# Altium PCB nails_PCB_v2_diamond_4x4_ground_plane.PcbDoc
Units mil, origin at the board's own origin, x right, y up, seen from the top; angles counter-clockwise.
Board outline 639.76 x 1679.26 mil, 4 copper layers (Top Layer, Mid-Layer 1, Internal Plane 1, Bottom Layer); 42 components, 49 nets, 187 pads, 136 vias.
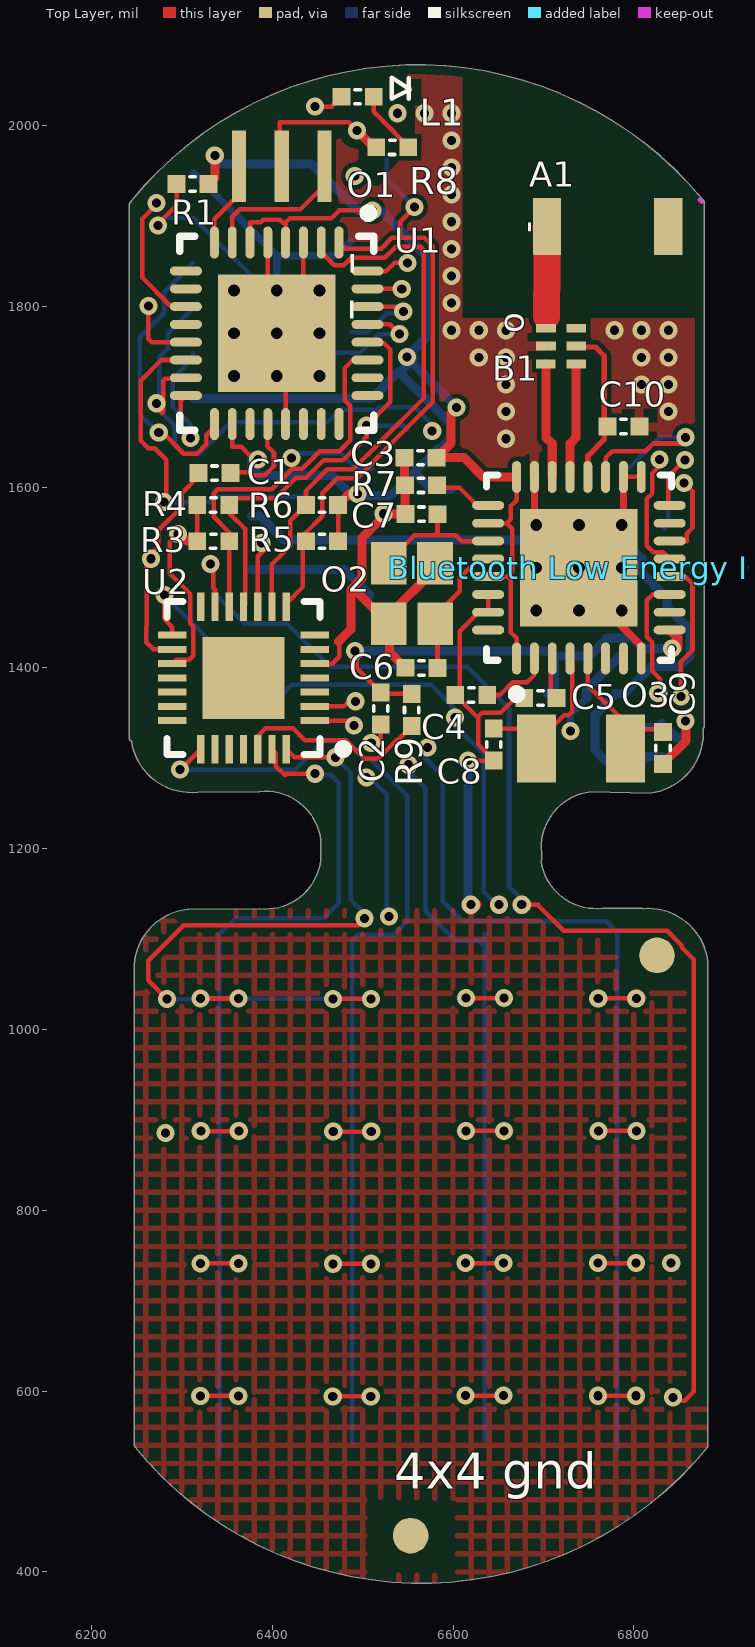
[diagram p0: Top Layer view]
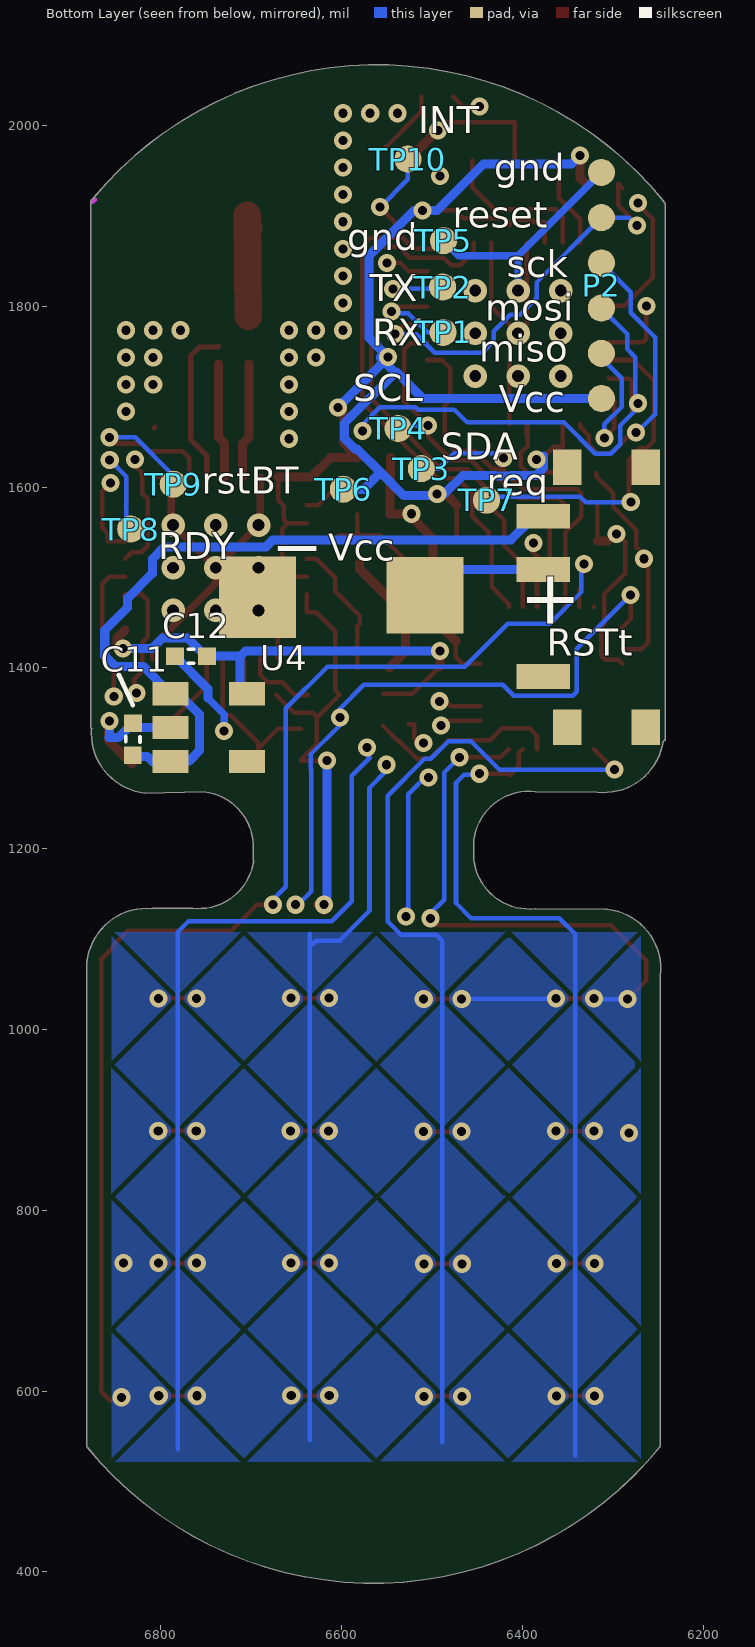
[diagram p1: Bottom Layer view, seen from below]
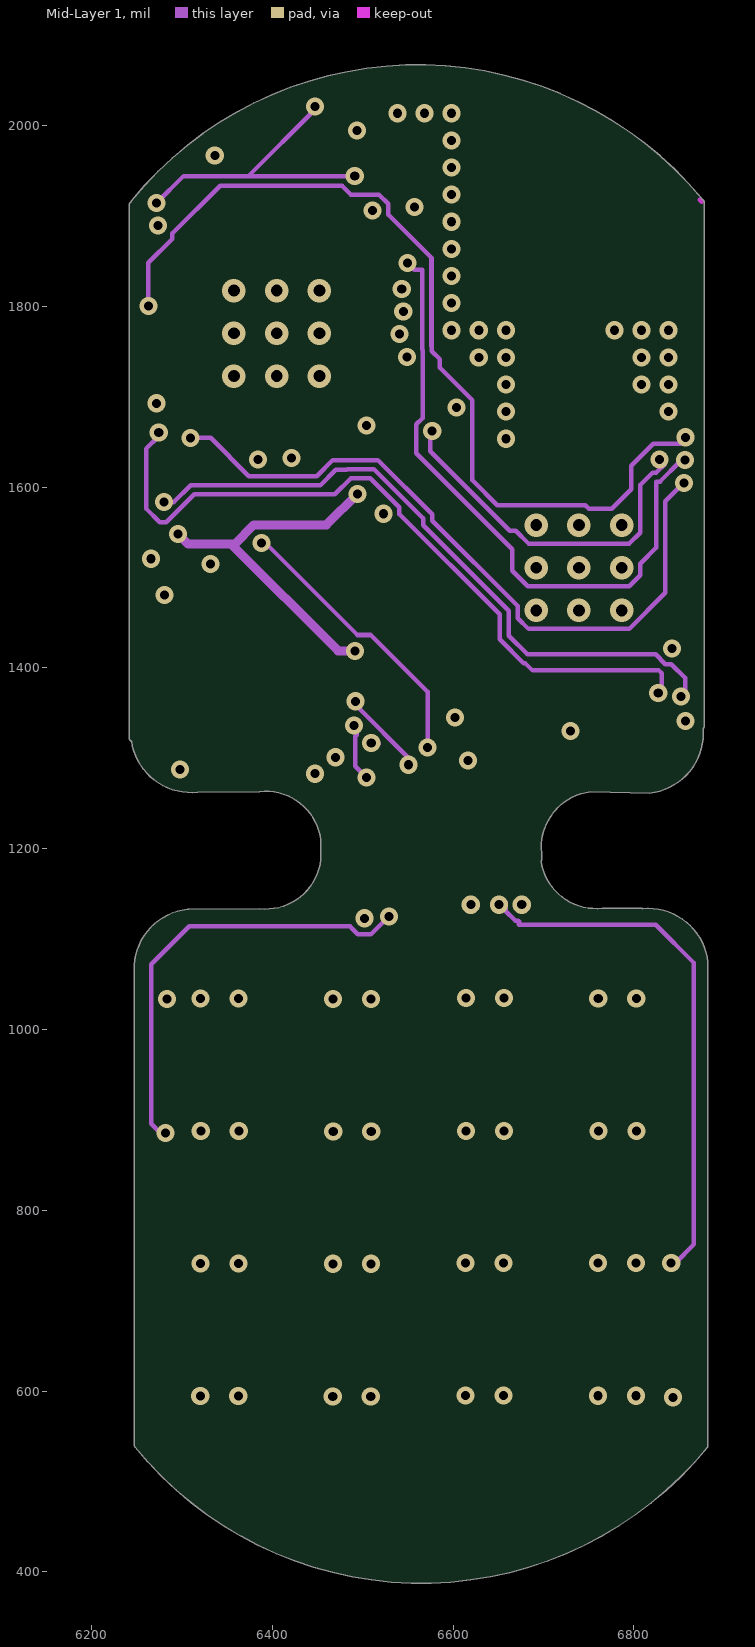
[diagram p2: Mid-Layer 1]
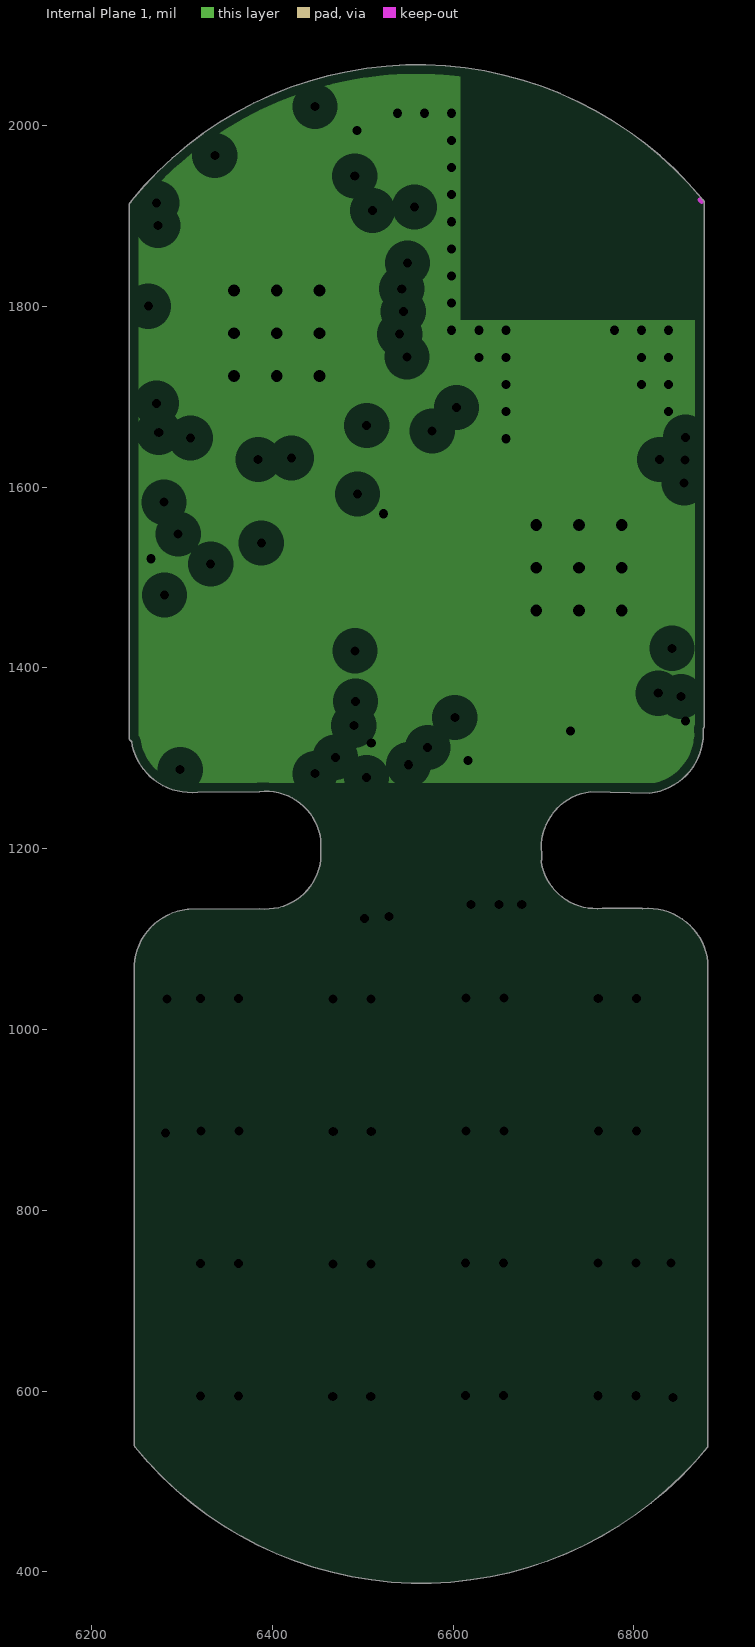
[diagram p3: Internal Plane 1, clearances drawn from the general rule]

## Layer stack, top to bottom
Top Layer: signal copper 1.4
Dielectric: core 12.6, FR-4, Dk 4.8
Mid-Layer 1: signal copper 1.4
Dielectric: prepreg 12.6, FR-4, Dk 4.8
Internal Plane 1: plane copper 1.4, net GND
Dielectric: core 12.6, FR-4, Dk 4.8
Bottom Layer: signal copper 1.4

## Board outline
6247.64,539.95 6247.64,1059.31 cw(c6250.1,1059.83) 6247.6,1059.56 cw(c6313.71,1066.9) 6306.34,1133.01 cw(c6306.62,1130.51) 6307.28,1132.93 6385.59,1133.57 cw(c6385.62,1131.05) 6385.61,1133.57 6385.6,1133.57 cw(c6385.62,1131.05) 6385.9,1133.55 ccw(c6392.69,1194.66) 6453.78,1187.73 6453.79,1209.06 cw(c6456.3,1209.06) 6453.81,1209.39 ccw(c6392.77,1201.97) 6385.98,1263.08 cw(c6385.71,1265.58) 6385.73,1263.06 6317.46,1262.43 cw(c6310.24,1328.55) 6244.42,1318.96 cw(c6244.65,1321.46) 6242.13,1321.46 6242.13,1912.65 cw(c6244.65,1912.65) 6243.77,1915 cw(c6246.28,1915.06) 6244.33,1916.65 cw(c6560.69,1658.99) 6874.82,1919.37 cw(c6872.88,1917.77) 6875.39,1918.02 cw(c6875.13,1915.52) 6877.65,1915.52 6877.65,1334.66 cw(c6875.13,1334.66) 6876.64,1332.65 cw(c6810.31,1327.6) 6876.83,1327.6 cw(c6810.31,1327.6) 6817.68,1261.49 cw(c6817.4,1263.99) 6817.35,1261.48 6752.18,1262.82 ccw(c6759.15,1201.73) 6698.05,1194.94 cw(c6695.55,1194.67) 6698.06,1194.67 cw(c6695.55,1194.67) 6698.06,1194.67 6698.06,1188.13 cw(c6695.55,1188.13) 6698.06,1188.13 cw(c6695.55,1188.13) 6697.39,1186.42 ccw(c6758.24,1195.2) 6765.03,1134.09 cw(c6765.31,1131.59) 6765.32,1134.1 6808.73,1133.92 cw(c6808.71,1131.41) 6809.92,1133.61 cw(c6815.78,1067.36) 6881.88,1074.72 cw(c6879.38,1074.44) 6881.9,1074.44 6881.9,539.45 cw(c6879.38,539.45) 6881.33,537.86 cw(c6564.97,795.52) 6248.2,538.36 cw(c6250.15,539.95)

## Design rules (kind name [scope] priority, off if disabled: settings)
Clearance [All] p1: gap=5
HoleSize [All] p1: absolutevalues=TRUE maxlimit=100 minlimit=10 maxpercent=80.000 minpercent=20.000
PlaneClearance [All] p1: clearance=20
PlaneConnect [All] p1: planeconnectstyle=Direct reliefexpansion=20 reliefentries=4 reliefconductorwidth=10 reliefairgap=10
PolygonConnect [All] p1: connectstyle=Direct reliefconductorwidth=10 reliefentries=4 polygonreliefangle="90 Angle" airgapwidth=10
RoutingVias [All] p1: holewidth=10 width=20 viastyle="Through Hole" minholewidth=10 minwidth=20 maxholewidth=20 maxwidth=50
SolderMaskExpansion [All] p1: expansion=4
Width [All] p1: maxlimit=30 minlimit=5 preferedwidth=5
25 further rules are at their usual default settings.

## Components (designator, comment, footprint, x,y, rotation, side; value= is the part's Value field where it differs from the comment)
* "ON_OFF_SWITCH" SWTICH_SMD_SIDE 6247.19,1398.4 r90 bottom
A1 "2.45 GHz Chip antenna" 2450AT18A100E 6714.43,1883.53 r0 top
B1 "2.45 GHz Bulan" 2450BM14A0002 6703.9,1740.12 r90 top
"Bluetooth Low Energy IC" "nRF8001" QFN32_W_GND 6740,1510 r90 top
C1 "0.1uF" 0402W 6321.07,1615.39 r0 top
C2 "0.1uF" 0402W 6520,1340 r90 top
C3 "4.7uF" 0402W 6548.9,1632.47 r0 top
C4 "0.1uF" 0402W 6605,1370 r0 top
C5 "0.033uF" 0402W 6681.47,1366.64 r0 top
C6 "6pF" 0402W 6550,1400 r0 top
C7 "6pF" 0402W 6550,1570 r0 top
C8 "18pF" 0402W 6645,1300 r90 top
C9 "18pF" 0402W 6832.13,1296.32 r90 top
C10 "22pF 5%" 0402W 6803.63,1666.74 r180 top
C11 "10uF" 0402W 6831.01,1336.17 r270 bottom
C12 "10uF" 0402W 6781.87,1412.92 r180 bottom
L1 "LED" 0402W 6479.39,2031.65 r0 top
O1 "Resonator SMD" "Resonator SMD" 6441.03,1952.83 r270 top
O2 "16 MHz Crystal Cl=8pF" "2.5 x 2.0 crystal" 6530,1450 r90 top
O3 "32.768 Crystal Cl=12.5pF" "32.768 Crystal" 6695,1310 r0 top
P2 "6 pin smd 1.27mm female" "6pos 1.27mm" 6625.68,1953.07 r90 bottom
R1 "10K" 0402W 6296.86,1935.23 r0 top
R3 "1.8K" 0402W 6350,1540 r180 top
R4 "1.8K" 0402W 6350,1580 r180 top
R5 "4.7K" 0402W 6440,1540 r0 top
R6 "4.7K" 0402W 6440,1580 r0 top
R7 "22k 1%" 0402W 6549.44,1601.91 r0 top
R8 "330" 0402W 6517.64,1975.75 r0 top
R9 "20K" 0402W 6554.33,1368.5 r270 top
TP1 "Test point small" "TEST POINT SMD SUPER SMALL" 6487.87,1770.99 r270 bottom
TP2 "Test point small" "TEST POINT SMD SUPER SMALL" 6488.39,1821.17 r270 bottom
TP3 "Test point small" "TEST POINT SMD SUPER SMALL" 6511.98,1620.29 r270 bottom
TP4 "Test point small" "TEST POINT SMD SUPER SMALL" 6537.67,1664.68 r270 bottom
TP5 "Test point small" "TEST POINT SMD SUPER SMALL" 6487.51,1872.41 r270 bottom
TP6 "Test point small" "TEST POINT SMD SUPER SMALL" 6598.25,1597.47 r270 bottom
TP7 "Test point small" "TEST POINT SMD SUPER SMALL" 6439.87,1585.32 r270 bottom
TP8 "Test point small" "TEST POINT SMD SUPER SMALL" 6833.38,1553.49 r270 bottom
TP9 "Test point small" "TEST POINT SMD SUPER SMALL" 6786.3,1603.08 r270 bottom
TP10 "Test point small" "TEST POINT SMD SUPER SMALL" 6526.85,1962.66 r270 bottom
U1 "ATmega328P-MUR" 32M1-A_M 6405,1770 r270 top
U2 "MTCH6102" QFN28_no_gnd_conn 6375,1395 r180 top
U4 "MIC5205_VOLTAGE_REG" SOT-23-5 6725.45,1355.65 r270 bottom

## Footprints (in the part's own frame and the unit in brackets; to place one, negate y for a bottom-side part, rotate by r counter-clockwise, add the part's x,y. Pads: shape width x height; smd on the part's side, far side on the other; paste and mask are expansions set on the pad)
"2.5 x 2.0 crystal" [mm]
  rect 1.2x1 smd: 1(-0.033,-1.273) 2(1.667,-1.273) 3(1.667,0.026) 4(-0.033,0.025)
  body extent -0.46,-1.62 2.05,0.38, height 0.5
"6pos 1.27mm" [mil]
  round 30 smd: 1(-255.18,-312.9) 2(-205.22,-312.81) 3(-155.19,-312.82) 4(-105.18,-312.84) 5(-55.15,-312.85) 6(-5.14,-312.83)
"32.768 Crystal" [mm] "for BLE radio"
  rect 1.1x1.9 smd: 1(-0.07,0.019) 2(2.432,0.02)
  body extent -0.39,-0.71 2.81,0.78, height 0.9
32M1-A_M [mm] "QFN, 32-Leads, Body 5x5mm, Pitch 0.5mm, IPC Low Density"
  oval 0.9x0.25 smd: 1(-2.55,1.75) 2(-2.55,1.25) 3(-2.55,0.75) 4(-2.55,0.25) 5(-2.55,-0.25) 6(-2.55,-0.75) 7(-2.55,-1.25) 8(-2.55,-1.75) 17(2.55,-1.75) 18(2.55,-1.25) 19(2.55,-0.75) 20(2.55,-0.25) 21(2.55,0.25) 22(2.55,0.75) 23(2.55,1.25) 24(2.55,1.75)
  oval 0.25x0.9 smd: 9(-1.75,-2.55) 10(-1.25,-2.55) 11(-0.75,-2.55) 12(-0.25,-2.55) 13(0.25,-2.55) 14(0.75,-2.55) 15(1.25,-2.55) 16(1.75,-2.55) 25(1.75,2.55) 26(1.25,2.55) 27(0.75,2.55) 28(0.25,2.55) 29(-0.25,2.55) 30(-0.75,2.55) 31(-1.25,2.55) 32(-1.75,2.55)
  rect 3.3x3.3 smd: 33(0,0)
  silkscreen extent -3.5,-2.73 2.73,2.73, body extent -2.58,-2.58 2.58,2.58, height 1
0402W [mm]
  rect 0.5x0.5 smd: 1(-0.066,0) 2(0.834,-0.001)
  silkscreen extent 0.31,-0.2 0.46,0.2, body extent -0.08,-0.25 0.85,0.25, height 0.2
2450AT18A100E [mm] "Chip antenna 2.45 GHz"
  rect 0.8x1.6 smd: 1(-0.266,0.111) 2(3.135,0.111)
  body extent -0.14,-0.7 3.06,0.9, height 1.3
2450BM14A0002 [mm] "Balun for nRF8001"
  rect 0.25x0.55 smd: 1(0.901,0.027) 2(0.401,0.027) 3(-0.1,0.028) 4(-0.1,-0.822) 5(0.401,-0.823) 6(0.901,-0.823)
  body extent -0.39,-0.78 1.21,0.02, height 0.6
QFN28_no_gnd_conn [mm]
  rect 0.8x0.2 smd: 1(-1.829,1.356) 2(-1.829,0.956) 3(-1.829,0.556) 4(-1.829,0.156) 5(-1.829,-0.244) 6(-1.829,-0.644) 7(-1.829,-1.044) 15(2.171,-1.044) 16(2.171,-0.644) 17(2.171,-0.244) 18(2.171,0.156) 19(2.171,0.556) 20(2.171,0.956) 21(2.171,1.356)
  rect 0.2x0.8 smd: 8(-1.029,-1.844) 9(-0.629,-1.844) 10(-0.229,-1.844) 11(0.171,-1.844) 12(0.571,-1.844) 13(0.971,-1.844) 14(1.371,-1.844) 22(1.371,2.156) 23(0.971,2.156) 24(0.571,2.156) 25(0.171,2.156) 26(-0.229,2.156) 27(-0.629,2.156) 28(-1.029,2.156)
  rect 2.3x2.3 smd: 29(0.171,0.156)
  silkscreen extent -2.75,-1.99 2.32,2.31, body extent -1.83,-1.84 2.17,2.16, height 1
QFN32_W_GND [mm]
  oval 0.9x0.25 smd: 1(-2.532,1.769) 2(-2.532,1.269) 3(-2.532,0.769) 4(-2.532,0.269) 5(-2.532,-0.231) 6(-2.532,-0.731) 7(-2.532,-1.231) 8(-2.532,-1.731) 17(2.568,-1.731) 18(2.568,-1.231) 19(2.568,-0.731) 20(2.568,-0.231) 21(2.568,0.269) 22(2.568,0.769) 23(2.568,1.269) 24(2.568,1.769)
  oval 0.25x0.9 smd: 9(-1.732,-2.531) 10(-1.232,-2.531) 11(-0.732,-2.531) 12(-0.232,-2.531) 13(0.268,-2.531) 14(0.768,-2.531) 15(1.268,-2.531) 16(1.768,-2.531) 25(1.768,2.569) 26(1.268,2.569) 27(0.768,2.569) 28(0.268,2.569) 29(-0.232,2.569) 30(-0.732,2.569) 31(-1.232,2.569) 32(-1.732,2.569)
  rect 3.3x3.3 smd: 33(0.018,0.019)
  silkscreen extent -3.66,-2.58 2.62,2.62, body extent -2.56,-2.56 2.59,2.59, height 1
"Resonator SMD" [mm]
  rect 2x0.4 smd: 1(-0.05,-1.975) 2(-0.051,-0.775) 3(-0.051,0.425)
  body extent -0.77,-2.35 0.8,0.8, height 1.15
SOT-23-5 [mm]
  rect 0.65x1 smd: 1(-0.4,-1.625) 2(0.55,-1.625) 3(1.5,-1.625) 4(1.5,0.525) 5(-0.4,0.525)
  body extent -0.77,-1.68 1.88,0.58, height 1.1
SWTICH_SMD_SIDE [mm]
  rect 1.3x1.5 on Bottom Paste: 0(1.85,-0.575)
  rect 0.7x1.5 smd: 1(-0.2,3.3) 2(2.8,3.3) 3(4.3,3.3)
  rect 1x0.8 smd: NC(-1.625,0.425) NC(-1.625,2.625) NC(5.675,0.425) NC(5.675,2.625)
  body extent -1.4,-1.33 5.33,2.78, height 1.4
"TEST POINT SMD SUPER SMALL" [mil]
  round 30 smd: 0(0,0)

## Part data
*: "DPDT SMD Side Switch 240 mA at 5V"
A1: "for Bluetooth"
B1: "for nRF8001 chip"
C1 C2 C3 C4 C5 C6 C7 C8 C9 C10 C11 C12: library part Capacitor, "SMD Cap 1206"
L1: "LED SMD 1206/0603"
O1: "Build in caps"
O2: library part "16 MHz Crystal Wireless", "For BLE use"
O3: library part "32.768 Crystal"
R1 R3 R4 R5 R6 R7 R8 R9: library part Resistor
U1: "8-bit AVR Microcontroller, 32KB Flash, 1KB EEPROM, 2KB SRAM, 32-pin MLF, Industrial Grade (-40°C to 85°C)"
U4: "5V LDO SMD"

## Free pads (board coordinates)
  round 39.37 smd mask+19.68: 0(6553.11,440.17) 0(6825.56,1082)
  rect 85x85 smd far side: 3(6507.86,1480.3)
  rect 85x90 smd far side: 3(6693.22,1477.88)

## Via types
v1: diameter 20, hole 10, Top Layer to Bottom Layer, tented both sides, 118 vias
v2: diameter 25.98, hole 12.99, Top Layer to Bottom Layer, tented both sides, 18 vias

## Nets (pads, with @x,y where several pads share a name; then routed paths per layer and width w, separated by ;. In a path a pad name is that pad's centre, name@x,y a point inside that pad or via, vN(x,y) a via of type N, cw(c..) or ccw(c..) an arc to the next point about the centre after c; other vN are vias at no path point)
GND: "Bluetooth Low Energy IC.8" "Bluetooth Low Energy IC.17" "Bluetooth Low Energy IC.18" "Bluetooth Low Energy IC.23" "Bluetooth Low Energy IC.30" "Bluetooth Low Energy IC.31" "Bluetooth Low Energy IC.33" B1.2 C1.1 C2.1 C3.1 C4.1 C5.1 C6.1 C7.1 C8.1 C9.1 C10.1 C11.1 C12.1 O1.2 O2.2 O2.4 P2.6 pad.3@6693.22,1477.88 R7.1 R8.1 TP5.0 U1.3 U1.5 U1.21 U1.33 U2.5 U2.16 U4.2 | length 2672
  Top Layer w5: 6261.17,1471.93 6261.17,1520.67 6274.06,1533.56 6274.06,1552.18 6299.81,1577.93 6299.81,1592.99 6318.47,1611.66 C1.1 ; 6261.2,1471.9 6261.2,1446.03 6260.73,1445.56 6260.73,1428.38 6268.74,1420.37 U2.16 ; U1.5 6395.16,1779.84 v2(6405,1770) ; O1.2@6408.42,1960.86 6408.42,2003.28 6484.82,2003.28 v1(6493.74,1994.35) ; U1.21 6414.84,1760.16 v2(6405,1770) ; U1.3 6434.53,1799.53 v2(6405,1770) ; U2.5 6466.47,1404.62 6474,1412.15 6474,1426.06 6475.02,1427.09 6475.02,1427.82 6473.69,1429.16 ; v1@6517.64,1315.94 6515.57,1318.01 6520.01,1322.45 C2.1 C2.1@6525.74,1337.4 ; v1(6616.52,1297.4) C8.1 6645.01,1298.2 6627.7,1315.51 6627.7,1344.68 ; 6638.87,1481.19 6638.87,1461.51 6628.19,1461.51 6607.31,1440.63 6607.31,1374.9 C4.1 6627.7,1344.68 ; C5.1@6672.4,1369.99 6652.6,1350.19 6632.1,1350.19 6627.7,1345.8 6627.7,1344.68 ; 6788.47,1611.11 6808.16,1611.11 ; C10.1 C10.1@6808.16,1664.82
  Top Layer w8: 6690.05,1611.11 6690.05,1559.93 v2(6692.02,1557.96) v2(6739.26,1510.72) ; v1@6729.9,1330.71 6729.9,1330.1 v1(6730,1330) ; 6788.47,1611.11 6788.47,1559.93 v2(6786.5,1557.96) v2(6739.26,1510.72) ; 6808.16,1410.32 6808.16,1424.42 6739.26,1493.32 v2(6739.26,1510.72)
  Top Layer w10: 6473.62,1429.22 6486.96,1442.55 6486.96,1486.5 ; v1(6493.74,1994.35) R8.1@6515.27,1972.82 ; C3.1 6546.3,1602.44 R7.1 6546.84,1570.55 C7.1 6523.45,1569.99 v1(6523.03,1570.4) 6523.03,1567.12 6499.31,1543.4 6499.31,1498.85 6486.96,1486.5 ; C6.1 6529.72,1417.67 6529.72,1447.99 O2.4 ; O2.2 6580.12,1509.31 6529,1458.19 O2.4 ; v1(6619.65,1138) 6626.71,1138 6623.58,1134.87 6616.52,1134.87 v1@6620,1131.38 ; C9.1 6857.88,1319.45 6857.88,1340.22 v1(6857.02,1341.08) ; 6486.96,1486.5 6491.22,1486.5 O2.4
  Mid-Layer 1 w5: v1(6493.74,1994.35) v1@6494.03,1994.07 ; v1@6511.14,1319.27 6514.32,1319.27 v1@6517.64,1315.94
  Bottom Layer w8: P2.6 6405,1855.77 ; v2(6405,1817.24) 6405,1855.77 ; TP5.0 6470.86,1855.77 6405,1855.77 ; v1(6730,1330) 6730,1348.51 6747.9,1366.41
  Bottom Layer w10: v1(6616.52,1297.4) 6616.52,1134.87 v1(6619.65,1138) ; 6747.9,1366.41 6747.9,1376.5 6784.31,1412.91 C12.1 ; U4.2 6826.25,1334 C11.1 6846.68,1323.11 6857.38,1323.11 6857.02,1323.47 v1(6857.02,1341.08)
  other v1: 6509.55,1316.88 6265.82,1520.67 6658.49,1653.38 6658.49,1683.38 6838.49,1683.38 6658.49,1713.38 6808.49,1713.38 6838.49,1713.38 6628.49,1743.38 6658.49,1743.38 6808.49,1743.38 6838.49,1743.38 6598.49,1773.38 6628.49,1773.38 6658.49,1773.38 6778.49,1773.38 6808.49,1773.38 6838.49,1773.38 6598.49,1803.38 6598.49,1833.38 6598.49,1863.38 6598.49,1893.38 6598.49,1923.38 6598.49,1953.38 6598.49,1983.38 6538.49,2013.38 6568.49,2013.38 6598.49,2013.38
  other v2: 6692.02,1463.47 6739.26,1463.47 6786.5,1463.47 6692.02,1510.72 6786.5,1510.72 6739.26,1557.96 6357.76,1722.76 6405,1722.76 6452.24,1722.76 6357.76,1770 6452.24,1770 6357.76,1817.24 6452.24,1817.24
INT: R5.1 TP10.0 U1.1 U2.8 | length 699.9
  Top Layer w5: U2.8 6415.52,1470.95 6434.06,1489.49 6434.06,1536.64 R5.1 6437.4,1549.7 6455.51,1567.8 6455.51,1592.9 6472.11,1609.51 6486.8,1609.51 6487.14,1609.85 6493.91,1609.85 6528.96,1644.9 6528.96,1645.4 6577.37,1693.81 6577.37,1866.52 6568.39,1875.5 6541.56,1875.5 ; U1.1 6480.68,1863.61 6520.52,1863.61 6532.4,1875.5 6541.56,1875.5 ; v1(6557.56,1909.56) 6541.56,1893.56 6541.56,1875.5
  Bottom Layer w5: TP10.0 6526.85,1940.27 v1(6557.56,1909.56)
LED1: L1.1 U1.11 | length 527.2
  Top Layer w5: v1(6272.21,1914.21) 6272.21,1912.55 6256.11,1896.46 6256.11,1831.63 6287.44,1800.31 6303.82,1800.31 U1.11 ; v1(6447.49,2020.78) 6465.93,2020.78 L1.1
  Mid-Layer 1 w5: v1(6272.21,1914.21) 6301.96,1943.96 6373.8,1943.96 ; v1(6447.49,2020.78) 6447.49,2017.65 6373.8,1943.96 ; v1(6491.29,1943.96) 6373.8,1943.96
  Bottom Layer w5: v1@6444.11,2021.44 6446.83,2021.44 v1(6447.49,2020.78)
MISO: "Bluetooth Low Energy IC.14" P2.2 U1.16 | length 1051.2
  Top Layer w5: U1.16 6298.71,1695.21 6298.71,1665.19 v1(6309.56,1654.35) ; 6839.65,1540.25 6858.56,1540.25 6858.56,1548.47 6864.87,1554.79 6864.87,1595.16 v1(6855.7,1604.33) ; v1(6855.7,1604.33) 6856.36,1605 6858,1605 6857.33,1604.33 v1(6855.7,1604.33)
  Mid-Layer 1 w5: v1(6309.56,1654.35) 6331.9,1654.35 6374.18,1612.07 6449.21,1612.07 6466.99,1629.85 6516.94,1629.85 6577.1,1569.69 6577.1,1562.82 6671.52,1468.39 6671.52,1454.99 6683.53,1442.98 6794.99,1442.98 6834.88,1482.87 6834.88,1584.16 6856.34,1605.62 6856.96,1605 6858,1605 6857.33,1604.33 v1(6855.7,1604.33)
  Bottom Layer w5: v1(6309.56,1654.35) 6309.56,1669.29 6290.27,1688.57 6290.27,1720.39 6312.86,1742.98 P2.2
MOSI: "Bluetooth Low Energy IC.13" P2.3 U1.15 | length 1125.1
  Top Layer w5: v1(6272.15,1692.59) 6277.56,1692.59 6278.08,1692.07 6278.08,1681.35 6279.39,1682.65 6279.39,1717.63 6281.31,1719.55 6303.37,1719.55 U1.15 ; v1(6828.54,1630.29) 6832.01,1626.83 6820.58,1615.4 6820.58,1593.17 6814.44,1587.03 6814.44,1535.1 6821.71,1527.83 6832.39,1527.83 6839.65,1520.56
  Mid-Layer 1 w5: v1(6577,1662) 6574.94,1659.94 6574.94,1639.71 6662.89,1551.76 6669.24,1551.76 6683.53,1537.47 6794.99,1537.47 6807,1549.47 6807,1602.2 ; 6806.96,1602.23 6820.74,1616 6824.86,1616 6834.15,1625.29 6833.55,1625.29 v1(6828.54,1630.29)
  Bottom Layer w5: P2.3 6284.41,1769.44 6284.41,1752.76 6275.27,1743.63 6275.27,1692.59 6267.43,1692.59 6292.06,1667.96 6292.06,1647.1 6302.33,1636.83 6319.5,1636.83 6354.17,1671.5 6461.42,1671.5 6475.31,1685.39 6515.59,1685.39 6518.52,1688.32 6557.86,1688.32 6577,1669.19 v1(6577,1662)
Net*_3: *.3 C11.2 U4.1 U4.3 | length 814.3
  Bottom Layer w10: *.3 6386.6,1567.69 6412.85,1541.43 6676.03,1541.43 6683.75,1533.71 6796.03,1533.71 6809.5,1520.24 6809.5,1504.36 6836.84,1477.02 6836.84,1466.87 6862.13,1441.58 6862.13,1413.3 6850.42,1401.58 6819.61,1401.58 U4.1 6780.2,1371.4 6757.08,1348.28 6757.08,1308.74 6768.88,1296.94 6789.08,1296.94 U4.3 ; U4.3@6808.98,1295.94 6815.18,1302.15 C11.2@6831.05,1302.15
NetA1_1: A1.1 B1.1 | length 113.9
  Top Layer w30: A1.1@6702.82,1886.78 A1.1 ; 6703.39,1788.61 A1.1@6704.51,1900.94
NetB1_3: "Bluetooth Low Energy IC.22" B1.3 | length 128
  Top Layer w10: B1.3 6702.8,1654.75 6709.73,1647.82 6709.73,1611.11
NetB1_4: "Bluetooth Low Energy IC.21" B1.4 | length 127.9
  Top Layer w10: 6729.42,1611.11 6729.42,1648.05 6736.26,1654.89 B1.4
NetB1_5: "Bluetooth Low Energy IC.20" B1.5 C10.2 | length 176.9
  Top Layer w6: B1.5 6737.34,1754.83 6757.5,1754.83 6767.17,1745.17 6767.17,1652.55 6749.1,1634.48 6749.1,1611.11
"NetBluetooth Low Energy IC_2": "Bluetooth Low Energy IC.2" C4.2 | length 79.6
  Top Layer w5: C4.2 6651.9,1369.95 6665.92,1383.97 6681.89,1383.97 6690.05,1392.12 6690.05,1410.32
"NetBluetooth Low Energy IC_3": "Bluetooth Low Energy IC.3" C5.2 | length 41.2
  Top Layer w5: C5.2@6707.85,1369.95 6707.85,1408.44 6709.73,1410.32
"NetBluetooth Low Energy IC_4": "Bluetooth Low Energy IC.4" C8.2 O3.1 | length 176.1
  Top Layer w5: C8.2 6670.15,1332.85 O3.1 6692.25,1317 6722.75,1347.5 6727.76,1347.5 6731.66,1351.4 6731.66,1408.08 6729.42,1410.32
"NetBluetooth Low Energy IC_5": "Bluetooth Low Energy IC.5" C9.2 O3.2 | length 146.4
  Top Layer w5: 6749.1,1410.32 6749.1,1380.9 6790.74,1339.26 6790.74,1325.43 6797.6,1332.29 C9.2@6832.18,1332.29
"NetBluetooth Low Energy IC_25": "Bluetooth Low Energy IC.25" R7.2 | length 65.8
  Top Layer w5: R7.2 6585.19,1598.97 6607.36,1598.97 6626.71,1579.62 6638.87,1579.62
"NetBluetooth Low Energy IC_27": "Bluetooth Low Energy IC.27" C7.2 O2.3 | length 151.6
  Top Layer w5: O2.3 6528.99,1518.42 6557.33,1546.76 6580.12,1546.76 ; C7.2 6582.85,1549.49 6580.12,1546.76 ; 6638.87,1540.25 6638.62,1540 6609.67,1540 6602.91,1546.76 6580.12,1546.76
"NetBluetooth Low Energy IC_28": "Bluetooth Low Energy IC.28" C6.2 O2.1 | length 152.3
  Top Layer w5: C6.2 6582.85,1446 O2.1 6580.13,1457.33 6607.31,1484.51 6607.31,1499.68 6628.19,1520.56 6638.87,1520.56
NetC1_2: C1.2 U1.20 | length 117.1
  Top Layer w5: C1.2 6355.08,1616.5 6373.74,1616.5 6377.26,1612.98 6391.76,1612.98 6402.01,1623.23 6402.01,1637.73 6394.5,1645.23 6394.5,1668.95 U1.20 U1.20@6395.16,1656.58
NetL1_2: L1.2 R8.2 | length 71.7
  Top Layer w5: L1.2 6512.24,2015.18 6520.99,2006.43 6520.99,2006.14 6550.49,1976.64 R8.2
NetO1_1: O1.1 U1.8 | length 105
  Top Layer w5: U1.8 6336.1,1896.22 6359.82,1919.94 O1.1@6359.82,1965.56
NetO1_3: O1.3 U1.7 | length 171.6
  Top Layer w5: U1.7 6355.79,1898.03 6355.36,1898.46 6363.95,1907.05 6431.31,1907.05 6455.65,1931.39 O1.3@6455.65,1960.85
RDY: "Bluetooth Low Energy IC.16" TP8.0 U1.32 | length 897.2
  Top Layer w5: U1.32 6505.88,1838.41 6525.69,1838.41 6535.51,1848.23 6549.32,1848.23 v1(6549.81,1847.74) ; 6839.65,1579.62 6838.2,1581.07 6838.2,1611.58 v1(6856.61,1630) v1@6861,1630
  Mid-Layer 1 w5: v1(6549.81,1847.74) 6557.2,1840.35 6566.2,1840.35 6566.2,1751.55 6566.5,1751.25 6566.5,1676.25 6559.5,1669.25 6559.5,1637.29 6665.58,1531.21 6665.58,1507.4 6682.75,1490.23 6794.99,1490.23 6807,1502.23 6807,1515.14 6824.88,1533.02 6824.88,1606 6829,1606 v1@6850.89,1627.89
  Bottom Layer w5: TP8.0 6838.2,1558.31 6838.2,1611.58 v1(6856.61,1630)
REQ: "Bluetooth Low Energy IC.12" TP7.0 U1.14 | length 1267.4
  Top Layer w5: v1(6280.31,1583.19) 6280.83,1583.19 6282.8,1581.21 6282.8,1630.2 6270.12,1642.88 6270.12,1643 6263,1643 6254.65,1651.35 6254.65,1717.64 6277.48,1740.47 U1.14 ; 6839.65,1500.88 6857,1500.88 6864.87,1493 6864.87,1419.57 6852.11,1406.82 v1(6852.11,1368.24)
  Mid-Layer 1 w5: v1(6280.31,1583.19) 6290.92,1583.19 6309.8,1602.07 6453.35,1602.07 6470.34,1619.06 6482.2,1619.06 6483,1619.85 6512.48,1619.85 6566.78,1565.55 6567.1,1565.55 6567.1,1557.65 6661.52,1463.22 6661.52,1435.6 6682.29,1414.83 6824.13,1414.83 6834.88,1404.08 6841.39,1404.08 6856.61,1388.86 6856.61,1372.74 v1(6852.11,1368.24)
  Bottom Layer w5: v1(6280.31,1583.19) 6330.27,1583.19 6336.05,1588.97 6436.22,1588.97 TP7.0
RESET: P2.5 R1.1 U1.29 | length 461.7
  Top Layer w5: v1@6274.75,1890.34 v1(6273.61,1889.21) 6273.61,1890.87 6294.26,1911.51 R1.1 R1.1@6289.71,1930.67 ; U1.29@6506.16,1779.08 U1.29 6530.16,1779.84 v1(6541,1769)
  Bottom Layer w5: v1(6273.61,1889.21) 6282.32,1897.92 P2.5 6384.51,1826.24 6384.51,1808.76 6402.77,1790.49 6413.49,1790.49 6431.75,1772.23 6431.75,1761.51 6444.77,1748.49 6497.19,1748.49 6517.7,1769 v1(6541,1769)
RST_BT: "Bluetooth Low Energy IC.19" TP9.0 U1.13 | length 1316.3
  Top Layer w5: v1(6263,1800) 6263,1763.92 6266.91,1760.01 6304.46,1760.01 U1.13 ; 6768.79,1611.11 6768.79,1632.17 6768.69,1632.27 6776.09,1639.67 6812.79,1639.67 6821.23,1648.11 6860.98,1648.11 6860.98,1657.29 6858.69,1655 v1(6857,1655)
  Mid-Layer 1 w5: v1(6263,1800) 6263,1847.92 6289.71,1874.63 6289.71,1880.56 6342.41,1933.26 6477.24,1933.26 6487.11,1923.39 6518.13,1923.39 6528.38,1913.14 6528.38,1901.37 6576.2,1853.55 6576.2,1755.69 6576.5,1755.39 6576.5,1750.23 6585.56,1741.17 6585.56,1731.83 6621.5,1695.89 6621.5,1607.29 6648.83,1579.96 6746.24,1579.96 6750.38,1575.82 6775.38,1575.82 6796.96,1597.4 6796.96,1623.46 6821.29,1647.79 6851.48,1647.79 6858.69,1655 v1(6857,1655)
  Bottom Layer w5: TP9.0 6786.3,1612.8 6828.5,1655 v1(6857,1655)
RST_TOUCH: R9.2 U2.26 | length 217.5
  Top Layer w5: U2.26 6384.02,1324.68 6392.73,1333.38 6422.56,1333.38 6435.89,1320.06 6481.63,1320.06 6502.3,1299.38 6516.8,1299.38 6537.47,1320.06 6538.69,1320.06 R9.2
RX: TP1.0 U1.30 | length 108.6
  Top Layer w5: U1.30 6539.47,1799.53 v1(6545,1794)
  Bottom Layer w5: TP1.0 6505.43,1770.99 6526.65,1792.22 6543.22,1792.22 v1(6545,1794)
RX0: U2.13 | length 1596.7
  Top Layer w5: v1(6320.46,594.69) v1(6362.5,594.69) ; v1(6332,1515) 6333,1515 6334.86,1516.86 6334.86,1488.43 6337.14,1486.15 6337.14,1467.98 U2.13 ; v1(6466.96,594.23) v1(6509,594.23) ; v1(6613.82,595.02) v1(6655.86,595.02) ; v1@6675.09,1138 6694.36,1138 6694.36,1137.14 6722.31,1109.19 6836.82,1109.19 6852.74,1093.26 6852.74,1090.84 6866.06,1077.52 6866.06,599.43 6856.11,589.48 6843.37,589.48 v1(6843.37,593.21) ; v1(6760.33,594.91) v1(6802.36,594.91)
  Mid-Layer 1 w5: v1(6843.37,593.21) v1@6846.08,595.91
  Bottom Layer w5: v1(6332,1515) 6333,1515 v1@6334.86,1516.86 ; v1@6334.86,1518.55 v1@6334.86,1516.86 ; v1@6681.97,1138 6661.91,1158.06 6661.91,1355.17 6615.77,1401.31 6463.97,1401.31 6416.35,1448.93 6369.81,1448.93 6334.86,1483.88 v1@6334.86,1516.86
  other v1: 6676,1138
RX1: U2.14 | length 0.1
  Top Layer w5: U2.14 U2.14@6321.08,1467.66
RX2: U2.15 | length 1474.6
  Top Layer w5: v1(6280.76,1480.41) 6280.51,1480.16 6280.51,1454.06 6289.53,1445.03 U2.15 ; v1(6320.53,741.33) v1(6362.57,741.33) ; v1(6467.04,740.87) v1(6509.07,740.87) ; v1(6613.9,741.65) v1(6655.93,741.65) ; v1@6651,1135.14 v1(6651,1138) ; v1(6760.4,741.55) v1(6802.44,741.55)
  Mid-Layer 1 w5: v1(6651,1138) 6655.75,1142.75 6656.34,1142.75 6658.5,1140.58 6658.5,1130.75 6668.75,1120.5 6672.19,1120.5 6672.99,1119.7 6672.99,1115.82 6824.22,1115.82 6866.46,1073.57 6866.46,762.43 6845.63,741.6 v1(6841.35,741.6)
  Bottom Layer w5: v1(6280.76,1480.41) 6340.08,1421.08 6340.08,1373.64 6344.47,1369.24 6409.74,1369.24 6421.81,1381.31 6575.61,1381.31 6602,1354.93 v1(6602,1345) 6602,1336.66 6634.02,1304.65 6634.02,1288.63 6633.8,1288.41 6633.8,1152.63 6651.45,1134.97 6651.45,1137.55 v1(6651,1138) ; v1@6840.2,742.74 v1(6841.35,741.6)
RX3: U2.18
RX4: U2.19
RX5: U2.20
RX6: U2.21
RX7: U2.22 | length 1084.2
  Top Layer w5: v1(6298.26,1287.37) U2.22
  Bottom Layer w5: v1(6298.26,1287.37) 6425.51,1287.37 6456.7,1318.56 6482.19,1318.56 6501.37,1299.38 6508.42,1299.38 6549.15,1258.65 6549.15,1119.35 6534.41,1104.61 6495.19,1104.61 6488.7,1098.12 6488.68,543.28
RX8: U2.23
RX9: U2.27 | length 953.9
  Top Layer w5: U2.27 6404.08,1305.82 6404.08,1291.28 6414.25,1281.1 6416.03,1282.88 v1(6447.49,1282.88)
  Bottom Layer w5: 6341.62,1104.24 6341.94,528.4 ; 6341.98,1105.78 6359.4,1123.2 6456.95,1123.2 6473.62,1139.88 6473.62,1272.84 6464.79,1281.68 6448.7,1281.68 v1(6447.49,1282.88)
RX10: U2.28 | length 886.5
  Top Layer w5: v1(6283.72,1033.56) 6263,1054.28 6263,1076.11 6302.12,1115.23 6495.82,1115.23 6501.89,1121.3 6501.89,1122.89 v1(6502,1123) ; v1(6320.78,1034.27) v1(6362.82,1034.27) ; U2.28 6424.6,1301.06 v1(6469.84,1301.06) ; v1(6467.29,1033.81) v1(6509.32,1033.81) ; v1(6614.15,1034.6) v1(6656.18,1034.6) ; v1(6760.65,1034.49) v1(6802.69,1034.49)
  Mid-Layer 1 w5: v1(6283.72,1033.56) v1@6283.72,1036.48 ; v1(6469.84,1301.06) v1@6475.33,1295.56
  Bottom Layer w5: v1(6283.72,1033.56) 6320.07,1033.56 v1(6320.78,1034.27) ; v1(6362.82,1034.27) 6363.29,1033.81 v1(6467.29,1033.81) ; v1(6469.84,1301.06) 6486.7,1284.19 6486.7,1143.65 6501.75,1128.6 6501.75,1120.16 6502,1120.41 v1(6502,1123)
RX11: U2.1 | length 962
  Top Layer w5: v1(6321.02,887.62) v1(6363.06,887.62) ; U2.1 6484.8,1341.63 v1(6490.3,1336.13) ; v1(6467.53,887.16) v1(6509.56,887.16) ; v1(6529,1125) 6531.2,1127.2 v1@6531.2,1127.37 ; v1(6614.39,887.95) v1(6656.42,887.95) ; v1(6760.89,887.84) v1(6802.93,887.84)
  Mid-Layer 1 w5: v1(6282.1,885.54) 6276.27,885.54 6266.22,895.59 6266.22,1072.23 6308.13,1114.15 6486.1,1114.15 6488.65,1111.6 6488.56,1111.51 6494.56,1105.5 6509.25,1105.5 6528.75,1125 v1(6529,1125) ; v1(6490.3,1336.13) 6493.37,1339.21 6493.37,1325.45 6492.05,1324.13 6492.05,1291.01 v1(6504.2,1278.86)
  Bottom Layer w5: v1(6282.1,885.54) v1@6283.72,887.16 ; v1(6504.2,1278.86) 6504.2,1282.6 6526.46,1260.34 6526.46,1118.92 6529,1121.46 v1(6529,1125)
RX12: U2.2 | length 960.8
  Top Layer w5: U2.2 6479.38,1357.38 6485,1363 v1(6492,1363)
  Mid-Layer 1 w5: v1@6485,1363 v1(6492,1363) ; v1@6487.2,1356.8 6494.38,1356.8 6550.61,1300.57 v1(6550.61,1292.83)
  Bottom Layer w5: v1(6550.61,1292.83) 6550.61,1286.15 6569.3,1267.47 6569.3,1131.27 6602.45,1098.12 6628.35,1098.12 6635.2,1091.27 ; 6635.2,545.74 6635.2,1091.27 ; 6635.2,1106.02 6635.2,1091.27
RX13: U2.4
RX14: U2.10 | length 1354.6
  Top Layer w5: U2.10 6384.02,1523.57 6395.55,1535.09 6392.64,1538 6392,1538 6390.85,1536.85 6389.15,1536.85 v1(6388,1538)
  Mid-Layer 1 w5: v1(6388,1538) 6389.15,1536.85 6390.85,1536.85 6392,1538 6392.64,1538 6494.33,1436.31 6509,1436.31 6572,1373.31 v1(6572,1312)
  Bottom Layer w5: v1(6572,1312) 6572,1303.73 6568.9,1300.63 6588.79,1280.75 6588.79,1141.92 6610.99,1119.71 6769.48,1119.71 6781.39,1107.8 6781.39,535.99
SCK: "Bluetooth Low Energy IC.11" P2.4 U1.17 | length 1273.3
  Top Layer w5: v1(6274.56,1660.5) 6278.66,1660.5 6302.31,1636.85 6316.81,1636.85 6327.06,1647.1 6327.06,1657.43 6336.1,1666.47 U1.17 ; v1(6827,1372) 6829.47,1374.47 6829.47,1387.42 6820.58,1396.3 6820.58,1428.27 6814.44,1434.41 6814.44,1474.61 6821.02,1481.19 6839.65,1481.19 6840.32,1480.53
  Mid-Layer 1 w5: v1(6274.56,1660.5) 6274.56,1656.31 6260.5,1642.25 6260.5,1576.21 6275.79,1560.92 6282.8,1560.92 6313.95,1592.07 6469.36,1592.07 6487.14,1609.85 6508.33,1609.85 6540.53,1577.65 6540.53,1570.07 6651.52,1459.08 6651.52,1431.46 6678.15,1404.83 6680.15,1404.83 6687.93,1397.06 6827.76,1397.06 6830.74,1394.08 6830.74,1375.74 v1(6827,1372)
  Bottom Layer w5: v1(6274.56,1660.5) 6273.06,1662 6272.15,1662 6253.5,1680.65 6253.5,1765.75 6280.5,1792.75 6280.5,1815.55 P2.4
SCL: R4.1 TP4.0 U1.28 U2.11 | length 486.2
  Top Layer w5: U2.11 6369.94,1469.28 6369.94,1553.69 6352.6,1571.04 R4.1 6359.94,1587.36 6403.56,1587.36 6426.36,1610.16 6437.48,1610.16 6456.84,1629.51 6478.31,1629.51 6504.5,1655.71 v1(6504.5,1667.89) 6530.61,1694 6530.61,1752.16 6523.56,1759.21 6506.34,1759.21 U1.28
  Bottom Layer w5: v1(6504.5,1667.89) 6545.06,1667.89 TP4.0@6549.5,1663.44
SDA: R3.1 TP3.0 U1.27 U2.12 | length 531.7
  Top Layer w5: U2.12 6352.53,1492.12 6352.6,1492.2 R3.1 6352.6,1549.72 6335.26,1567.06 6335.26,1592.96 6339.65,1597.36 6399.42,1597.36 6422.22,1620.16 ; v1(6421.33,1632.2) 6422.22,1631.31 6422.22,1620.16 ; U1.27 6489.09,1740.47 6480.18,1731.56 6480.18,1695.96 6486.32,1689.82 6486.32,1651.67 6474.16,1639.51 6452.69,1639.51 6433.34,1620.16 6422.22,1620.16
  Bottom Layer w5: v1(6421.33,1632.2) 6426.68,1637.55 6475.46,1637.55 6492.72,1620.29 TP3.0
SYNC: R6.1 U1.2 U2.9 | length 620.4
  Top Layer w5: U2.9 6399.77,1514.57 6420.06,1534.85 6420.06,1562.64 R6.1 6437.4,1595.93 6460.98,1619.51 6482.66,1619.51 6483,1619.85 6489.76,1619.85 6518.96,1649.05 6518.96,1649.55 6567.37,1697.96 6567.37,1862.38 6564.25,1865.5 6536.55,1865.5 6524.66,1853.61 6487.48,1853.61 6479.04,1845.18 6468.75,1845.18 6454.21,1859.72 U1.2
TX: TP2.0 U1.31 | length 93.7
  Top Layer w5: U1.31 v1(6543.31,1819.18)
  Bottom Layer w5: TP2.0 6490.38,1819.18 v1(6543.31,1819.18)
VCC: "Bluetooth Low Energy IC.1" "Bluetooth Low Energy IC.9" "Bluetooth Low Energy IC.24" "Bluetooth Low Energy IC.26" "Bluetooth Low Energy IC.29" C2.2 C3.2 C12.2 P2.1 R1.2 R3.2 R4.2 R5.2 R6.2 R9.1 TP6.0 U1.4 U1.6 U1.18 U2.17 U4.5 | length 3088.7
  Top Layer w5: U2.17 6293.84,1408.93 6308.39,1408.93 6312.78,1413.33 6312.78,1445.57 6309.59,1448.76 6309.59,1481.58 6286.5,1504.68 6286.5,1539.24 v1@6295.63,1548.37 ; R3.2 R4.2 ; U1.18 6355.79,1644.42 6365.6,1644.42 6376.02,1634 6380.99,1634 v1(6384.51,1630.48) ; U1.6 6375.67,1870.59 6375.67,1892.76 6387.17,1892.76 6390.01,1895.61 6408.48,1895.61 6412.57,1891.53 ; 6414.84,1889.25 6414.84,1892.67 6419.22,1897.05 6465.48,1897.05 6474.31,1905.89 v1(6510.88,1905.89) ; R5.2 R6.2 ; 6491.19,1401.71 C2.2 6521.79,1371.11 R9.1 ; 6638.87,1500.88 6660.41,1500.88 ; 6638.87,1559.93 6659.58,1559.93 ; 6670.32,1611.07 6670.32,1585.4 6664.08,1579.17 6664.08,1564.43 6659.58,1559.93 ; 6670.36,1410.32 6670.55,1410.51 6670.55,1432.61 6664.08,1439.08 6664.08,1497.21 6660.41,1500.88 ; 6659.58,1559.93 6665.58,1553.94 6665.58,1506.04 6660.41,1500.88
  Top Layer w10: v1@6297.06,1549.06 6306.08,1540.05 R3.2 ; R1.2 6336.52,1941.99 v1(6336.52,1966.68) ; R6.2 6485.25,1592.35 v1(6494.39,1592.35) ; 6491.19,1401.71 6491.19,1418.5 v1(6491.5,1418.81) ; v1(6604,1688) 6597.93,1681.93 6597.93,1648.6 C3.2 6612.22,1632.42 6633.58,1611.07 6670.32,1611.07 ; 6839.65,1441.82 6848.63,1432.84 6848.63,1421.58 v1(6842.13,1421.58)
  Mid-Layer 1 w10: v1(6296,1548) 6307.14,1536.86 6354.86,1536.86 ; v1(6491.5,1418.81) 6472.9,1418.81 6354.86,1536.86 ; v1(6494.39,1592.35) 6460.04,1558 6379.72,1558 6358.57,1536.86 6354.86,1536.86
  Bottom Layer w5: v1@6376.91,1633.12 v1@6376.91,1633.91
  Bottom Layer w10: P2.1 6510.41,1697.89 6539.9,1727.38 ; v1(6336.52,1966.68) 6345.76,1957.44 6443.05,1957.44 6494.6,1905.89 v1(6510.88,1905.89) 6519.95,1905.89 6569.81,1856.03 6569.81,1764.81 v1(6549,1744) v1@6557,1744 ; v1@6376.91,1633.12 6376.91,1620.95 6384.9,1612.95 6412.3,1612.95 6413.05,1612.2 6429.61,1612.2 6430.36,1612.95 6465.81,1612.95 v1@6485.88,1592.88 ; v1@6376.91,1633.91 6377,1634 6380.52,1630.48 v1(6384.51,1630.48) ; v1(6491.5,1418.81) 6706.34,1418.81 6712.45,1412.71 ; v1(6494.39,1592.35) 6496.34,1590.4 6531.32,1590.4 6557.11,1616.2 ; 6557,1735.2 6597.93,1694.28 6597.93,1694.07 v1(6604,1688) ; v1@6557,1742.5 6541.88,1727.38 6539.9,1727.38 ; TP6.0 6575.85,1597.47 6557.11,1616.2 ; U4.5 6712.45,1379.07 6712.45,1412.71 ; v1(6842.13,1421.58) 6809.62,1421.58 6798.45,1432.75 6770.49,1432.75 6750.61,1412.88 C12.2 6712.62,1412.88 6712.45,1412.71 ; 6539.9,1727.38 6597,1670.28 6597,1653.72 6585.28,1642 6582.91,1642 6557.11,1616.2
VIN: *.2 pad.3@6507.86,1480.3 | length 142.5
  Bottom Layer w10: *.2 6479.52,1508.63 pad.3@6507.86,1480.3
pads on no net: "Bluetooth Low Energy IC.6" "Bluetooth Low Energy IC.7" "Bluetooth Low Energy IC.10" "Bluetooth Low Energy IC.15" "Bluetooth Low Energy IC.32" *.0 *.1 *.NC A1.2 B1.6 U1.9 U1.10 U1.12 U1.19 U1.22 U1.23 U1.24 U1.25 U1.26 U2.3 U2.6 U2.7 U2.24 U2.25 U2.29 U4.4

## Polygon pours and split planes (outlines as drawn)
GND on Top Layer "Top Layer-No Net" (hatched 90Degree grid 20 track 6, remove dead copper, pour order 44): 6250.15,539.95 6250.15,1059.83 6250.1,1059.83 cw(c6313.71,1066.9) 6306.62,1130.51 6306.62,1130.41 6385.62,1131.05 6765.31,1131.59 6808.71,1131.41 6808.71,1130.96 cw(c6815.78,1067.36) 6879.38,1074.44 6879.38,539.45 cw(c6564.97,795.52)
GND on Top Layer "Top Layer-No Net" (solid, remove dead copper, pour order 43): 6872.65,1610.64 6468.73,1610.64 6468.43,1610.94 6468.43,2060.56 6469.45,2061.59 6473.56,2065.7 6608.71,2065.7 6610.25,2064.16 6610.25,1786.17 6610.76,1786.68 6872.83,1786.68 6872.01,1785.86 6872.01,1636.16 6871.37,1635.52 6871.37,1611.59
RX10 on Bottom Layer "Top Layer-No Net" (solid, pour order 84): 6269.13,1103.53 6269.13,964.34 6269.14,964.34 6338.72,1033.92
RX9 on Bottom Layer "Top Layer-No Net" (solid, pour order 83): 6411.82,1107.37 6272.63,1107.37 6272.63,1107.36 6342.21,1037.78
RX10 on Bottom Layer "Top Layer-No Net" (solid, pour order 68): 6415.62,1103.85 6415.65,1103.85 6485.17,1034.33 6415.58,964.73 6415.58,964.74 6345.98,1034.33
RX9 on Bottom Layer "Top Layer-No Net" (solid, pour order 67): 6342.16,1030.82 6342.19,1030.82 6411.72,961.3 6411.71,961.3 6342.12,891.71 6272.53,961.3
RX9 on Bottom Layer "Top Layer-No Net" (solid, pour order 66): 6342.46,884.45 6342.49,884.45 6412.01,814.93 6342.42,745.34 6272.83,814.93
RX11 on Bottom Layer "Top Layer-No Net" (solid, pour order 82): 6269.55,957.59 6269.55,818.4 6339.14,887.98
RX2 on Bottom Layer "Top Layer-No Net" (solid, pour order 81): 6269.34,811.3 6269.34,672.11 6269.35,672.11 6338.93,741.69
RX9 on Bottom Layer "Top Layer-No Net" (solid, pour order 65): 6342.48,738.1 6342.51,738.1 6412.03,668.58 6342.44,598.99 6272.85,668.58
RX0 on Bottom Layer "Top Layer-No Net" (solid, pour order 80): 6269.3,664.65 6269.3,525.47 6269.29,525.46 6269.3,525.46 6338.88,595.05
RX11 on Bottom Layer "Top Layer-No Net" (solid, pour order 64): 6415.35,957.28 6415.38,957.28 6484.9,887.75 6415.31,818.16 6345.72,887.76
RX9 on Bottom Layer "Top Layer-No Net" (solid, pour order 79): 6272.85,521.77 6412.04,521.77 6412.04,521.76 6412.04,521.77 6342.46,591.36
RX0 on Bottom Layer "Top Layer-No Net" (solid, pour order 63): 6415.7,664.85 6415.73,664.85 6485.25,595.33 6415.66,525.74 6346.07,595.33
RX7 on Bottom Layer "Top Layer-No Net" (solid, pour order 62): 6488.24,884.39 6488.27,884.39 6557.79,814.87 6488.2,745.28 6418.61,814.87
RX2 on Bottom Layer "Top Layer-No Net" (solid, pour order 61): 6415.46,810.9 6415.49,810.9 6485.01,741.38 6415.42,671.79 6345.83,741.38
RX7 on Bottom Layer "Top Layer-No Net" (solid, pour order 60): 6488.56,738.07 6488.59,738.07 6558.11,668.55 6488.51,598.96 6418.92,668.55
RX0 on Bottom Layer "Top Layer-No Net" (solid, pour order 59): 6561.72,664.88 6561.75,664.88 6631.27,595.36 6561.68,525.76 6561.68,525.77 6492.09,595.36
RX0 on Bottom Layer "Top Layer-No Net" (solid, pour order 58): 6708.11,664.75 6708.14,664.75 6777.66,595.23 6708.07,525.64 6638.48,595.23
RX12 on Bottom Layer "Top Layer-No Net" (solid, pour order 57): 6634.86,738.03 6634.89,738.03 6704.41,668.5 6634.82,598.91 6634.82,598.92 6565.23,668.51
RX2 on Bottom Layer "Top Layer-No Net" (solid, pour order 56): 6561.66,811.17 6561.69,811.17 6631.21,741.64 6561.62,672.05 6561.62,672.06 6492.03,741.65
RX11 on Bottom Layer "Top Layer-No Net" (solid, pour order 55): 6561.83,957.42 6561.86,957.42 6631.39,887.9 6631.38,887.9 6561.79,818.31 6492.2,887.9
RX7 on Bottom Layer "Top Layer-No Net" (solid, pour order 54): 6488.54,1030.55 6488.58,1030.55 6558.1,961.02 6558.09,961.02 6488.5,891.43 6418.91,961.02
RX10 on Bottom Layer "Top Layer-No Net" (solid, pour order 53): 6561.98,1103.73 6562.01,1103.73 6631.53,1034.21 6561.94,964.62 6492.35,1034.21
RX10 on Bottom Layer "Top Layer-No Net" (solid, pour order 52): 6708.24,1103.8 6708.28,1103.8 6777.8,1034.28 6708.2,964.69 6638.61,1034.28
RX12 on Bottom Layer "Top Layer-No Net" (solid, pour order 51): 6635.14,1030.67 6635.17,1030.67 6704.69,961.15 6635.09,891.55 6635.09,891.56 6565.5,961.15
RX12 on Bottom Layer "Top Layer-No Net" (solid, pour order 50): 6634.98,884.26 6635.02,884.26 6704.54,814.73 6704.53,814.73 6634.94,745.14 6634.94,745.15 6565.35,814.74
RX7 on Bottom Layer "Top Layer-No Net" (solid, pour order 78): 6419.06,522.28 6558.25,522.28 6558.25,522.29 6488.67,591.87
RX12 on Bottom Layer "Top Layer-No Net" (solid, pour order 77): 6565.37,521.92 6704.55,521.92 6634.97,591.51
RX14 on Bottom Layer "Top Layer-No Net" (solid, pour order 76): 6711.77,521.9 6850.96,521.9 6850.96,521.91 6781.38,591.49
RX11 on Bottom Layer "Top Layer-No Net" (solid, pour order 49): 6708.19,957.61 6708.23,957.61 6777.75,888.09 6777.74,888.09 6708.15,818.5 6638.56,888.09
RX2 on Bottom Layer "Top Layer-No Net" (solid, pour order 48): 6707.99,811.03 6708.02,811.03 6777.54,741.51 6707.95,671.92 6638.36,741.51
RX14 on Bottom Layer "Top Layer-No Net" (solid, pour order 47): 6781.27,884.32 6781.3,884.32 6850.82,814.8 6781.23,745.21 6711.64,814.8
RX14 on Bottom Layer "Top Layer-No Net" (solid, pour order 46): 6781.54,737.57 6781.57,737.57 6851.09,668.05 6781.5,598.46 6711.9,668.05
RX7 on Bottom Layer "Top Layer-No Net" (solid, pour order 75): 6558.2,1107.73 6419.01,1107.73 6419.01,1107.72 6488.59,1038.14
RX12 on Bottom Layer "Top Layer-No Net" (solid, pour order 74): 6704.64,1107.46 6565.46,1107.46 6565.45,1107.46 6565.45,1107.45 6635.04,1037.87
RX14 on Bottom Layer "Top Layer-No Net" (solid, pour order 73): 6850.98,1107.52 6711.79,1107.52 6711.79,1107.51 6781.37,1037.93
RX10 on Bottom Layer "Top Layer-No Net" (solid, pour order 72): 6854.27,964.73 6854.27,1103.92 6854.26,1103.92 6784.68,1034.34
RX11 on Bottom Layer "Top Layer-No Net" (solid, pour order 71): 6854.9,818.5 6854.9,957.68 6854.9,957.69 6854.89,957.69 6785.31,888.1
RX2 on Bottom Layer "Top Layer-No Net" (solid, pour order 70): 6854.62,671.89 6854.62,811.08 6854.61,811.08 6785.03,741.5
RX0 on Bottom Layer "Top Layer-No Net" (solid, pour order 69): 6854.62,525.38 6854.62,664.57 6785.03,594.99
RX14 on Bottom Layer "Top Layer-No Net" (solid, pour order 45): 6781.46,1030.54 6781.49,1030.54 6851.01,961.02 6781.41,891.43 6711.82,961.02
GND on Internal Plane 1 (split plane): 6578.05,2056.62 6595.38,2055.48 6608.39,2054.06 6608.39,1785.17 6867.56,1785.17 6867.56,1336.87 6866.89,1335.26 6866.55,1332.65 6866.65,1331.89 6866.58,1331.88 6866.79,1328 6866.74,1327.6 6866.79,1327.2 6866.46,1321.27 6865.4,1315.02 6863.65,1308.94 6861.22,1303.08 6858.16,1297.54 6854.49,1292.37 6850.27,1287.64 6845.54,1283.42 6840.38,1279.75 6834.83,1276.69 6828.98,1274.27 6822.89,1272.51 6822.49,1272.44 6774.76,1272.44 6752.39,1272.9 6752.29,1272.89 6752.18,1272.91 6751.05,1272.76 6751.04,1272.8 6749.96,1272.64 6749.77,1272.61 6749.74,1272.6 6748.67,1272.44 6404.88,1272.44 6399.79,1273.2 6392.77,1273.54 6385.76,1273.2 6385.64,1273.18 6385.63,1273.76 6384.83,1273.43 6384.87,1273.14 6317.37,1272.51 6316.87,1272.44 6303.67,1272.44 6297.67,1273.46 6291.58,1275.22 6285.73,1277.64 6280.18,1280.71 6275.01,1284.37 6270.29,1288.6 6266.07,1293.32 6262.4,1298.49 6259.34,1304.03 6256.91,1309.89 6255.16,1315.98 6254.4,1320.41 6254.32,1320.4 6254.17,1321.57 6253.16,1324 6252.22,1325.22 6252.22,1909.6 6252.5,1909.96 6253.14,1911.51 6255.81,1914.83 6267.25,1927.88 6279.26,1940.43 6291.81,1952.43 6304.86,1963.88 6318.4,1974.75 6332.41,1985.02 6346.85,1994.67 6361.69,2003.68 6376.92,2012.03 6392.49,2019.71 6408.38,2026.7 6424.57,2033 6441.01,2038.58 6457.68,2043.44 6474.55,2047.56 6491.58,2050.95 6508.74,2053.59 6526.01,2055.48 6543.33,2056.62 6560.69,2057

## Keep-outs
Keep-Out Layer:
  lines w5: 6872.88,1917.77 6875.13,1915.52

## Other copper
Top Layer:
  pour cut-out: 6502.59,482.58 6502.59,396.48 6602.89,396.48 6604.78,394.58 6604.78,481.32
  pour cut-out: 6779.24,1135.13 6780.26,1040.21 6879.38,1040.21 6881.43,1047.13 6881.43,1133.87
Internal Plane 1 (plane layer: these items are gaps in the copper):
  rectangle: 6608.39,1785.17 6876.31,2072.15
  rectangle: 6234.07,390.31 6890.32,1272.44

## Silkscreen, mask and mechanical layers (free items; w line width, h text height)
Top Overlay:
  rectangle: 6486.11,1786.34 6489.85,1806.4
  rectangle: 6486.75,1837.39 6490.5,1857.45
  lines w5: 6551.14,2029.19 6551.14,2051.9 ; 6532.45,2029.66 6532.45,2052.6 6552.32,2039.6 6532.45,2029.66
  text "4x4 gnd" at 6535.22,492.22 h40
Bottom Overlay:
  lines w5: 6830.92,1358.45 6846.67,1392.52
  text "INT" at 6515.27,1991.39 h30
  text "gnd" at 6431.44,1938.59 h30
  text "reset" at 6477.33,1886.5 h30
  text "gnd" at 6593.99,1862.05 h30
  text "sck" at 6417.61,1832.24 h30
  text "TX" at 6568.77,1805.59 h30
  text "mosi" at 6441.45,1784.07 h30
  text "RX" at 6566.14,1756.49 h30
  text "miso" at 6447.65,1738.29 h30
  text "SCL" at 6587.12,1694.9 h30
  text "Vcc" at 6426.19,1682.49 h30
  text "SDA" at 6490.38,1630 h30
  text "rstBT" at 6754.62,1592.44 h30
  text "req" at 6439.53,1590.77 h30
  text "_" at 6669.74,1548.1 h60
  text "RDY" at 6802.92,1520.34 h30
  text "Vcc" at 6615.17,1518.61 h30
  text "+" at 6403.59,1448.94 h60
  text "RSTt" at 6373.27,1413.37 h30
Mechanical 1:
  lines w5: 6244.65,1912.65 6244.65,1321.46 ccw(c6308.25,1328.55) 6315.32,1264.94 ; 6246.28,1915.06 cw(c6560.69,1658.99) 6872.88,1917.77 ; 6250.1,1059.83 cw(c6313.71,1066.9) 6306.62,1130.51 ; 6250.15,1059.83 6250.15,539.95 ccw(c6564.97,795.52) 6879.38,539.45 6879.38,1074.44 ccw(c6815.78,1067.36) 6808.71,1130.96 ; 6306.62,1130.41 6385.62,1131.05 ccw(c6392.69,1194.66) 6456.3,1187.59 6456.3,1209.06 ; 6317.31,1264.94 6385.71,1265.58 cw(c6392.77,1201.97) 6456.38,1209.06 ; 6765.31,1131.59 6808.71,1131.41 ; 6766.22,1131.59 cw(c6759.15,1195.2) 6695.55,1188.13 6695.55,1194.67 cw(c6759.15,1201.73) 6752.07,1265.34 6817.4,1263.99 ; 6818.6,1264.12 ccw(c6811.51,1327.73) 6875.13,1334.66 6875.13,1915.52

## Text inside footprints (layer, text, board x,y; h text height)
A1: Top Overlay "-" at 6695.1,1880.43 h27.56 r90
B1: Top Overlay "o" at 6678.17,1769.8 h27.56 r90